# Altium PCB 小键盘 sc_2022-03-27.pcbdoc (part 2 of 2)
Units mil, origin at the board's own origin, x right, y up, seen from the top; angles counter-clockwise.
Board outline 7290 x 4525 mil, 2 copper layers (Top Layer, Bottom Layer); 48 components, 50 nets, 170 pads, 98 vias.
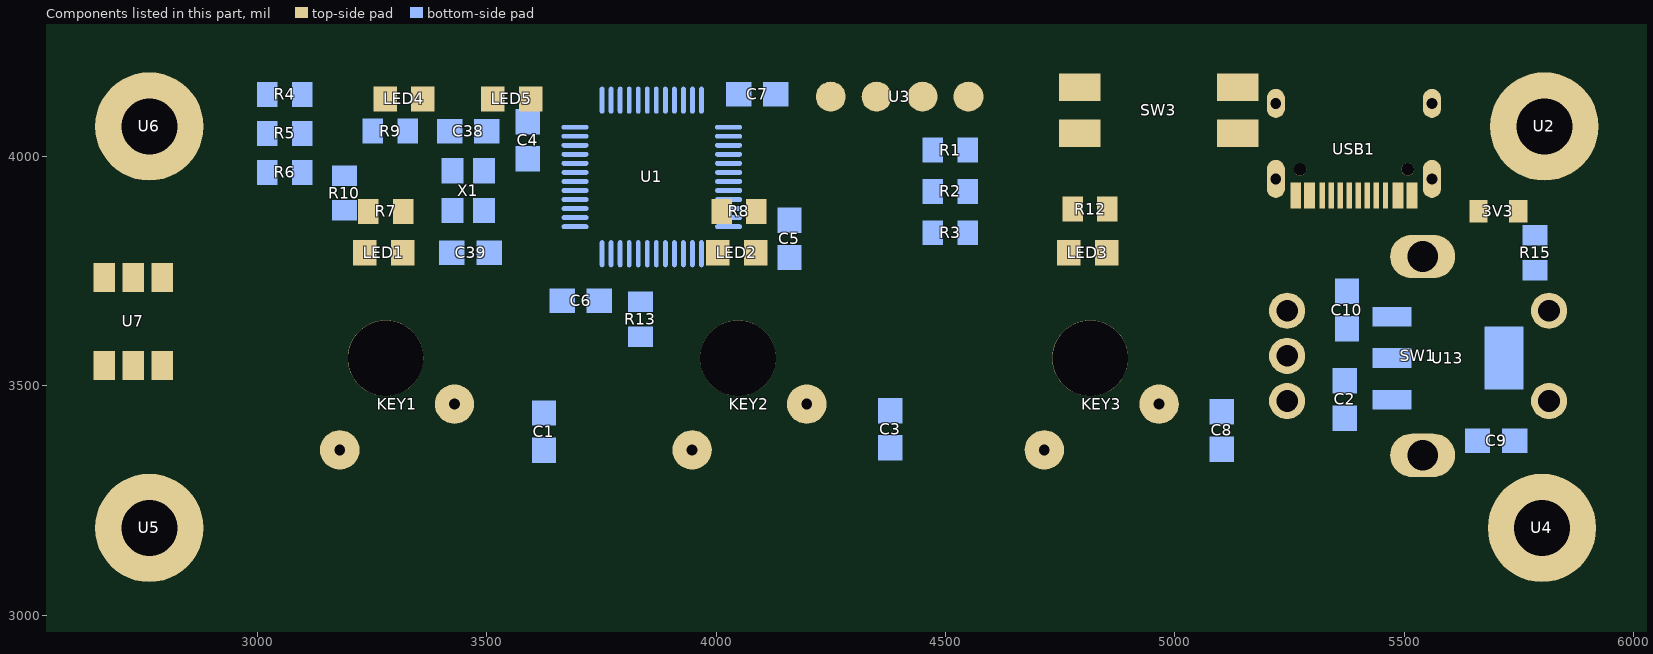
[diagram p2: the components of this part, seen from the top]

## Via types
v1: diameter 24, hole 12, Top Layer to Bottom Layer, tented both sides, 98 vias

## Nets (pads, with @x,y where several pads share a name; then routed paths per layer and width w, separated by ;. In a path a pad name is that pad's centre, name@x,y a point inside that pad or via, vN(x,y) a via of type N, cw(c..) or ccw(c..) an arc to the next point about the centre after c; other vN are vias at no path point) (continued)
copper on no net:
  other v1: 2717.5,3107.73 2812.5,3107.73 5752.5,3107.73 5847.5,3107.73 2670,3190 2860,3190 5705,3190 5895,3190 2717.5,3272.27 2717.5,3272.27 2812.5,3272.27 5752.5,3272.27 5752.5,3272.27 5847.5,3272.27 2717.5,3982.73 2812.5,3982.73 5757.5,3982.73 5852.5,3982.73 2670,4065 2860,4065 5710,4065 5900,4065 2717.5,4147.27 2717.5,4147.27 2812.5,4147.27 5757.5,4147.27 5757.5,4147.27 5852.5,4147.27

## Polygon pours and split planes (outlines as drawn)
GND on Bottom Layer (solid): 1595,5025 7505,5025 7790,4740 7790,1665 7625,1500 2315,1500 1500,2315 1500,2655 1550,2705
GND on Top Layer (solid): 2072.5,4602.5 6887.5,4602.5 6947.5,4662.5 6947.5,2257.5 6667.5,1977.5 2122.5,1977.5 1802.5,2297.5 1802.5,2352.5 2247.5,2797.5

## Keep-outs
Keep-Out Layer:
  lines w10: 2610,3152.01 ccw(c2728.11,3152.01) 2728.11,3033.9 ; 2610,4096.89 cw(c2728.11,4096.89) 2728.11,4215 ; 5838.35,3033.9 ccw(c5838.35,3152.01) 5956.46,3152.01 ; 5838.35,4215 cw(c5838.35,4096.89) 5956.46,4096.89

## Other copper
Top Layer:
  region net D-: 5314,4055 5311.01,4055.08 5308.51,4055.32 5306.4,4055.72 5304.54,4056.25 5302.84,4056.92 5301.17,4057.72 5299.42,4058.64 5297.48,4059.67 5295.23,4060.8 5284,4050 5295.23,4039.2 5297.48,4040.33 5299.42,4041.36 5301.17,4042.28 5302.84,4043.08 5304.54,4043.75 5306.4,4044.28 5308.51,4044.68 5311.01,4044.92 5314,4045
  region net D+: 5314.93,4019.45 5311.84,4020.07 5309.24,4020.63 5307.03,4021.16 5305.08,4021.7 5303.28,4022.28 5301.51,4022.94 5299.66,4023.72 5297.6,4024.66 5295.23,4025.8 5284,4015 5295.23,4004.2 5297.36,4005.33 5299.21,4006.45 5300.89,4007.5 5302.48,4008.44 5304.11,4009.22 5305.87,4009.78 5307.87,4010.07 5310.2,4010.04 5312.98,4009.64
  region net PA5: 3425,3546 3424.32,3534.78 3422.42,3525.8 3419.49,3518.52 3415.73,3512.36 3411.34,3506.76 3406.5,3501.16 3401.42,3495 3396.28,3487.72 3391.3,3478.74 3430,3438.5 3468.7,3478.74 3463.72,3487.72 3458.58,3495 3453.5,3501.16 3448.66,3506.76 3444.27,3512.36 3440.51,3518.52 3437.58,3525.8 3435.68,3534.78 3435,3546
  region net PA5: 3761.57,3919.49 3763.74,3921.55 3765.67,3923.14 3767.45,3924.36 3769.14,3925.3 3770.82,3926.03 3772.56,3926.64 3774.45,3927.23 3776.55,3927.88 3778.94,3928.66 3779.24,3944.24 3763.66,3943.94 3762.88,3941.55 3762.23,3939.45 3761.64,3937.56 3761.03,3935.82 3760.3,3934.14 3759.36,3932.45 3758.14,3930.67 3756.55,3928.74 3754.49,3926.57
  region net PA6: 3959,3850 3956.01,3850.08 3953.51,3850.32 3951.4,3850.72 3949.54,3851.25 3947.84,3851.92 3946.17,3852.72 3944.42,3853.64 3942.48,3854.67 3940.23,3855.8 3929,3845 3940.23,3834.2 3942.48,3835.33 3944.42,3836.36 3946.17,3837.28 3947.84,3838.08 3949.54,3838.75 3951.4,3839.28 3953.51,3839.68 3956.01,3839.92 3959,3840
  region net PA7: 4111.72,3455 4122.94,3454.32 4131.92,3452.42 4139.2,3449.49 4145.36,3445.73 4150.96,3441.34 4156.56,3436.5 4162.72,3431.42 4170,3426.28 4178.98,3421.3 4219.22,3460 4178.98,3498.7 4170,3493.72 4162.72,3488.58 4156.56,3483.5 4150.96,3478.66 4145.36,3474.27 4139.2,3470.51 4131.92,3467.58 4122.94,3465.68 4111.72,3465
  region net PA7: 3909.07,3862.07 3908.32,3865.52 3907.55,3868.37 3906.76,3870.78 3905.95,3872.88 3905.11,3874.83 3904.24,3876.76 3903.32,3878.83 3902.36,3881.17 3901.34,3883.94 3885.76,3884.24 3886.06,3868.66 3888.09,3868.06 3890.03,3867.61 3891.88,3867.21 3893.59,3866.76 3895.15,3866.15 3896.53,3865.29 3897.69,3864.06 3898.61,3862.37 3899.26,3860.12
  region net VCC: 4526.07,4140.01 4528.21,4137.91 4530.18,4136.02 4531.98,4134.32 4533.61,4132.76 4535.04,4131.31 4536.27,4129.95 4537.29,4128.65 4538.09,4127.36 4538.66,4126.06 4554.24,4125.76 4553.94,4141.34 4552.64,4141.91 4551.35,4142.71 4550.05,4143.73 4548.69,4144.96 4547.24,4146.39 4545.68,4148.02 4543.98,4149.82 4542.09,4151.79 4539.99,4153.93
  region net VCC: 5379.84,3486.55 5379.81,3489.55 5379.75,3492.28 5379.69,3494.76 5379.64,3497.01 5379.65,3499.04 5379.74,3500.87 5379.95,3502.52 5380.29,3504 5380.8,3505.32 5370,3516.55 5359.2,3505.32 5359.71,3504 5360.05,3502.52 5360.26,3500.87 5360.35,3499.04 5360.36,3497.01 5360.31,3494.76 5360.25,3492.28 5360.19,3489.55 5360.16,3486.55
  region net VCC: 3210.08,3780.16 3213.07,3780.18 3215.81,3780.25 3218.29,3780.31 3220.54,3780.36 3222.57,3780.35 3224.4,3780.26 3226.05,3780.05 3227.53,3779.71 3228.85,3779.2 3240.08,3790 3228.85,3800.8 3227.53,3800.29 3226.05,3799.95 3224.4,3799.74 3222.57,3799.65 3220.54,3799.64 3218.29,3799.69 3215.81,3799.75 3213.07,3799.82 3210.08,3799.84
  region net VCC: 4146.56,3758.94 4148.74,3761 4150.67,3762.59 4152.45,3763.82 4154.14,3764.75 4155.82,3765.48 4157.56,3766.09 4159.44,3766.68 4161.55,3767.32 4163.94,3768.11 4164.24,3783.69 4148.66,3783.39 4147.88,3781 4147.23,3778.89 4146.64,3777.01 4146.03,3775.27 4145.3,3773.59 4144.36,3771.9 4143.15,3770.12 4141.55,3768.19 4139.49,3766.01
  region net VCC: 4038.62,4156.96 4039.11,4154.34 4039.47,4151.93 4039.72,4149.72 4039.84,4147.71 4039.84,4145.88 4039.72,4144.23 4039.49,4142.74 4039.13,4141.41 4038.65,4140.23 4049.45,4129 4060.25,4140.23 4059.71,4141.69 4059.38,4143.32 4059.21,4145.15 4059.12,4147.17 4059.07,4149.41 4058.98,4151.88 4058.81,4154.59 4058.47,4157.56 4057.93,4160.81
  region net U7_3: 2791.57,3884.49 2793.74,3886.55 2795.67,3888.14 2797.45,3889.36 2799.14,3890.3 2800.82,3891.03 2802.56,3891.64 2804.45,3892.23 2806.55,3892.88 2808.94,3893.66 2809.24,3909.24 2793.66,3908.94 2792.88,3906.55 2792.23,3904.45 2791.64,3902.56 2791.03,3900.82 2790.3,3899.14 2789.36,3897.45 2788.14,3895.67 2786.55,3893.74 2784.49,3891.57
  region net U7_2: 2791.57,3839.49 2793.74,3841.55 2795.67,3843.14 2797.45,3844.36 2799.14,3845.3 2800.82,3846.03 2802.56,3846.64 2804.45,3847.23 2806.55,3847.88 2808.94,3848.66 2809.24,3864.24 2793.66,3863.94 2792.88,3861.55 2792.23,3859.45 2791.64,3857.56 2791.03,3855.82 2790.3,3854.14 2789.36,3852.45 2788.14,3850.67 2786.55,3848.74 2784.49,3846.57
  region net SWCLK: 3965,3904 3964.92,3901.01 3964.68,3898.51 3964.28,3896.4 3963.75,3894.54 3963.08,3892.84 3962.28,3891.17 3961.36,3889.42 3960.33,3887.48 3959.2,3885.23 3970,3874 3980.8,3885.23 3979.67,3887.48 3978.64,3889.42 3977.72,3891.17 3976.92,3892.84 3976.25,3894.54 3975.72,3896.4 3975.32,3898.51 3975.08,3901.01 3975,3904
  region net SWCLK: 4343.19,4106.12 4345.8,4108.66 4348.05,4110.74 4350.01,4112.48 4351.76,4114.02 4353.37,4115.49 4354.91,4117.01 4356.46,4118.71 4358.09,4120.72 4359.86,4123.16 4350.93,4135.93 4338.52,4126.5 4339.03,4124.79 4339.43,4123.21 4339.69,4121.73 4339.77,4120.32 4339.63,4118.95 4339.23,4117.58 4338.54,4116.19 4337.52,4114.73 4336.12,4113.19
  region net SWDIO: 4397.92,3945.96 4395.17,3945.55 4392.85,3945.47 4390.86,3945.69 4389.09,3946.15 4387.46,3946.83 4385.86,3947.68 4384.18,3948.65 4382.34,3949.7 4380.23,3950.8 4369,3940 4380.23,3929.2 4382.61,3930.36 4384.66,3931.36 4386.51,3932.22 4388.25,3932.98 4390.03,3933.66 4391.96,3934.28 4394.17,3934.89 4396.76,3935.51 4399.87,3936.16
  region net SWDIO: 4455,4106 4455.08,4108.99 4455.32,4111.49 4455.72,4113.6 4456.25,4115.46 4456.92,4117.16 4457.72,4118.83 4458.64,4120.58 4459.67,4122.52 4460.8,4124.77 4450,4136 4439.2,4124.77 4440.33,4122.52 4441.36,4120.58 4442.28,4118.83 4443.08,4117.16 4443.75,4115.46 4444.28,4113.6 4444.68,4111.49 4444.92,4108.99 4445,4106
  region net PB15: 4879.43,3455 4890.65,3454.32 4899.63,3452.42 4906.91,3449.49 4913.07,3445.73 4918.67,3441.34 4924.27,3436.5 4930.43,3431.42 4937.71,3426.28 4946.69,3421.3 4986.93,3460 4946.69,3498.7 4937.71,3493.72 4930.43,3488.58 4924.27,3483.5 4918.67,3478.66 4913.07,3474.27 4906.91,3470.51 4899.63,3467.58 4890.65,3465.68 4879.43,3465
  region net PB15: 4115.51,3976.57 4113.45,3978.74 4111.85,3980.67 4110.64,3982.45 4109.7,3984.14 4108.97,3985.82 4108.36,3987.56 4107.77,3989.45 4107.12,3991.55 4106.34,3993.94 4090.76,3994.24 4091.06,3978.66 4093.45,3977.88 4095.55,3977.23 4097.44,3976.64 4099.18,3976.03 4100.86,3975.3 4102.55,3974.36 4104.33,3973.14 4106.26,3971.55 4108.44,3969.49
  region net +5V: 5426,3820.16 5428.99,3820.18 5431.73,3820.25 5434.21,3820.31 5436.46,3820.36 5438.49,3820.35 5440.32,3820.26 5441.97,3820.05 5443.45,3819.71 5444.77,3819.2 5456,3830 5444.77,3840.8 5443.45,3840.29 5441.97,3839.95 5440.32,3839.74 5438.49,3839.65 5436.46,3839.64 5434.21,3839.69 5431.73,3839.75 5428.99,3839.82 5426,3839.84
  region net +5V: 5453.04,3846.96 5452.16,3846.08 5451.31,3845.24 5450.51,3844.44 5449.77,3843.71 5449.11,3843.07 5448.55,3842.54 5448.09,3842.13 5447.77,3841.86 5447.6,3841.76 5445.76,3825.76 5461.76,3827.6 5461.86,3827.77 5462.13,3828.09 5462.54,3828.55 5463.07,3829.11 5463.71,3829.77 5464.44,3830.51 5465.24,3831.31 5466.08,3832.16 5466.96,3833.04
  region net PB14: 4267.63,3999.44 4265.87,4001.34 4264.53,4003.07 4263.56,4004.69 4262.9,4006.26 4262.47,4007.84 4262.23,4009.49 4262.11,4011.27 4262.05,4013.22 4261.99,4015.42 4247.2,4020.3 4242.9,4005.33 4245.17,4003.72 4247.18,4002.42 4249.01,4001.3 4250.72,4000.26 4252.41,3999.19 4254.16,3997.98 4256.05,3996.51 4258.15,3994.68 4260.56,3992.37
  region net U7_1: 2805,3787.09 2805.1,3789.48 2805.39,3791.49 2805.87,3793.19 2806.54,3794.65 2807.4,3795.93 2808.44,3797.11 2809.66,3798.26 2811.06,3799.45 2812.64,3800.74 2807.5,3815.45 2793,3809.74 2793.12,3806.86 2793.34,3804.4 2793.61,3802.21 2793.92,3800.16 2794.23,3798.12 2794.53,3795.93 2794.77,3793.45 2794.94,3790.55 2795,3787.09
  region net 3V3_2: 5764.49,3841.47 5766.55,3839.3 5768.15,3837.37 5769.36,3835.59 5770.3,3833.9 5771.03,3832.22 5771.64,3830.48 5772.23,3828.59 5772.88,3826.49 5773.66,3824.1 5789.24,3823.8 5788.94,3839.38 5786.55,3840.16 5784.44,3840.81 5782.56,3841.4 5780.82,3842.01 5779.14,3842.74 5777.45,3843.68 5775.67,3844.89 5773.74,3846.49 5771.56,3848.55
  region net PA4: 3731,4015 3733.99,4014.92 3736.49,4014.68 3738.6,4014.28 3740.46,4013.75 3742.16,4013.08 3743.83,4012.28 3745.58,4011.36 3747.52,4010.33 3749.77,4009.2 3761,4020 3749.77,4030.8 3747.52,4029.67 3745.58,4028.64 3743.83,4027.72 3742.16,4026.92 3740.46,4026.25 3738.6,4025.72 3736.49,4025.32 3733.99,4025.08 3731,4025
  region net PB10: 3846,4055 3848.99,4054.92 3851.49,4054.68 3853.6,4054.28 3855.46,4053.75 3857.16,4053.08 3858.83,4052.28 3860.58,4051.36 3862.52,4050.33 3864.77,4049.2 3876,4060 3864.77,4070.8 3862.52,4069.67 3860.58,4068.64 3858.83,4067.72 3857.16,4066.92 3855.46,4066.25 3853.6,4065.72 3851.49,4065.32 3848.99,4065.08 3846,4065
  region net PB10: 3350.53,4065 3348.51,4065.16 3346.88,4065.61 3345.57,4066.33 3344.53,4067.28 3343.7,4068.44 3343,4069.77 3342.37,4071.25 3341.77,4072.85 3341.11,4074.53 3325.54,4074.01 3326.66,4058.47 3329.61,4057.62 3332.15,4056.91 3334.43,4056.34 3336.59,4055.88 3338.77,4055.53 3341.11,4055.28 3343.76,4055.12 3346.85,4055.03 3350.53,4055
  region net PB11: 3846,4020 3848.99,4019.92 3851.49,4019.68 3853.6,4019.28 3855.46,4018.75 3857.16,4018.08 3858.83,4017.28 3860.58,4016.36 3862.52,4015.33 3864.77,4014.2 3876,4025 3864.77,4035.8 3862.52,4034.67 3860.58,4033.64 3858.83,4032.72 3857.16,4031.92 3855.46,4031.25 3853.6,4030.72 3851.49,4030.32 3848.99,4030.08 3846,4030
  region net PB11: 3218.43,3980.51 3216.26,3978.45 3214.33,3976.86 3212.55,3975.64 3210.86,3974.7 3209.18,3973.97 3207.44,3973.36 3205.55,3972.77 3203.45,3972.12 3201.06,3971.34 3200.76,3955.76 3216.34,3956.06 3217.12,3958.45 3217.77,3960.55 3218.36,3962.44 3218.97,3964.18 3219.7,3965.86 3220.64,3967.55 3221.86,3969.33 3223.45,3971.26 3225.51,3973.43
  region net LED4_2: 3264.68,4074.83 3262.98,4072.57 3261.32,4070.91 3259.68,4069.74 3258,4068.93 3256.27,4068.36 3254.44,4067.94 3252.48,4067.54 3250.35,4067.04 3248.02,4066.34 3247.72,4050.76 3263.3,4051.06 3264.18,4053.53 3264.99,4055.63 3265.78,4057.47 3266.61,4059.16 3267.51,4060.81 3268.55,4062.53 3269.78,4064.45 3271.24,4066.66 3272.99,4069.27
  region net LED5_2: 3169.51,3895.41 3171.57,3893.24 3173.16,3891.31 3174.38,3889.54 3175.31,3887.85 3176.04,3886.17 3176.65,3884.43 3177.23,3882.54 3177.87,3880.44 3178.66,3878.05 3194.23,3877.71 3193.97,3893.29 3191.57,3894.08 3189.47,3894.73 3187.59,3895.32 3185.84,3895.94 3184.16,3896.68 3182.47,3897.61 3180.7,3898.83 3178.76,3900.43 3176.59,3902.49
Bottom Layer:
  region net VCC: 5380.22,3534.58 5377.18,3532.47 5374.5,3530.47 5372.13,3528.59 5370.04,3526.81 5368.18,3525.16 5366.51,3523.61 5365,3522.19 5363.59,3520.89 5362.25,3519.71 5367.56,3505.07 5381.99,3510.95 5382.12,3511.77 5382.56,3512.54 5383.25,3513.26 5384.18,3513.97 5385.31,3514.7 5386.6,3515.46 5388.03,3516.28 5389.56,3517.19 5391.16,3518.21
  region net VCC: 5348.84,3518.21 5350.44,3517.19 5351.97,3516.28 5353.4,3515.46 5354.69,3514.7 5355.82,3513.97 5356.75,3513.26 5357.44,3512.54 5357.88,3511.77 5358.01,3510.95 5372.44,3505.07 5377.75,3519.71 5376.41,3520.89 5375,3522.19 5373.49,3523.61 5371.82,3525.16 5369.96,3526.81 5367.87,3528.59 5365.5,3530.47 5362.82,3532.47 5359.78,3534.58
  region net VCC: 3258.01,3779.99 3255.87,3782.09 3253.9,3783.97 3252.1,3785.68 3250.47,3787.24 3249.04,3788.69 3247.81,3790.05 3246.79,3791.36 3245.99,3792.64 3245.41,3793.94 3229.84,3794.24 3230.14,3778.66 3231.44,3778.09 3232.72,3777.29 3234.03,3776.27 3235.39,3775.04 3236.84,3773.61 3238.4,3771.98 3240.11,3770.18 3241.99,3768.21 3244.09,3766.07
  region net VCC: 4796.12,3799.84 4793.12,3799.82 4790.39,3799.75 4787.91,3799.69 4785.66,3799.64 4783.63,3799.65 4781.8,3799.74 4780.15,3799.95 4778.67,3800.29 4777.35,3800.8 4766.12,3790 4777.35,3779.2 4778.67,3779.71 4780.15,3780.05 4781.8,3780.26 4783.63,3780.35 4785.66,3780.36 4787.91,3780.31 4790.39,3780.25 4793.12,3780.18 4796.12,3780.16
  region net VCC: 4751.79,3769.61 4755.51,3769.87 4758.78,3770.59 4761.66,3771.64 4764.21,3772.9 4766.49,3774.25 4768.54,3775.57 4770.43,3776.74 4772.22,3777.64 4773.96,3778.14 4777.05,3793.41 4761.67,3795.91 4761.19,3795.07 4760.59,3794.14 4759.86,3793.17 4758.98,3792.2 4757.93,3791.29 4756.71,3790.5 4755.29,3789.86 4753.65,3789.44 4751.79,3789.29
  region net VCC: 4139.49,3792.89 4141.55,3790.71 4143.15,3788.78 4144.36,3787 4145.3,3785.31 4146.03,3783.63 4146.64,3781.89 4147.23,3780.01 4147.88,3777.9 4148.66,3775.51 4164.24,3775.21 4163.94,3790.78 4161.55,3791.57 4159.44,3792.22 4157.56,3792.81 4155.82,3793.42 4154.14,3794.15 4152.45,3795.09 4150.67,3796.3 4148.74,3797.9 4146.56,3799.96
  region net VCC: 4184,3789.29 4181.01,3789.26 4178.27,3789.2 4175.79,3789.14 4173.54,3789.09 4171.51,3789.1 4169.68,3789.19 4168.03,3789.4 4166.55,3789.74 4165.23,3790.25 4154,3779.45 4165.23,3768.65 4166.55,3769.16 4168.03,3769.5 4169.68,3769.71 4171.51,3769.8 4173.54,3769.81 4175.79,3769.76 4178.27,3769.7 4181.01,3769.64 4184,3769.61
  region net VCC: 4025.45,4130 4028.44,4129.92 4030.94,4129.68 4033.05,4129.28 4034.91,4128.75 4036.61,4128.08 4038.28,4127.28 4040.03,4126.36 4041.97,4125.33 4044.22,4124.2 4055.45,4135 4044.22,4145.8 4041.97,4144.67 4040.03,4143.64 4038.28,4142.72 4036.61,4141.92 4034.91,4141.25 4033.05,4140.72 4030.94,4140.32 4028.44,4140.08 4025.45,4140
  region net SWDIO: 4351,3935 4353.99,3934.92 4356.49,3934.68 4358.6,3934.28 4360.46,3933.75 4362.16,3933.08 4363.83,3932.28 4365.58,3931.36 4367.52,3930.33 4369.77,3929.2 4381,3940 4369.77,3950.8 4367.52,3949.67 4365.58,3948.64 4363.83,3947.72 4362.16,3946.92 4360.46,3946.25 4358.6,3945.72 4356.49,3945.32 4353.99,3945.08 4351,3945
  region net SWCLK: 3975,3856 3975.08,3858.99 3975.32,3861.49 3975.72,3863.6 3976.25,3865.46 3976.92,3867.16 3977.72,3868.83 3978.64,3870.58 3979.67,3872.52 3980.8,3874.77 3970,3886 3959.2,3874.77 3960.33,3872.52 3961.36,3870.58 3962.28,3868.83 3963.08,3867.16 3963.75,3865.46 3964.28,3863.6 3964.68,3861.49 3964.92,3858.99 3965,3856
  region net D+: 5266,4010 5268.99,4009.92 5271.49,4009.68 5273.6,4009.28 5275.46,4008.75 5277.16,4008.08 5278.83,4007.28 5280.58,4006.36 5282.52,4005.33 5284.77,4004.2 5296,4015 5284.77,4025.8 5282.52,4024.67 5280.58,4023.64 5278.83,4022.72 5277.16,4021.92 5275.46,4021.25 5273.6,4020.72 5271.49,4020.32 5268.99,4020.08 5266,4020
  region net D-: 5266,4045 5268.99,4044.92 5271.49,4044.68 5273.6,4044.28 5275.46,4043.75 5277.16,4043.08 5278.83,4042.28 5280.58,4041.36 5282.52,4040.33 5284.77,4039.2 5296,4050 5284.77,4060.8 5282.52,4059.67 5280.58,4058.64 5278.83,4057.72 5277.16,4056.92 5275.46,4056.25 5273.6,4055.72 5271.49,4055.32 5268.99,4055.08 5266,4055
  region net EC11_B: 5185.37,3518.73 5192.19,3511.06 5196.79,3504.05 5199.65,3497.47 5201.26,3491.08 5202.09,3484.64 5202.63,3477.93 5203.37,3470.68 5204.78,3462.68 5207.36,3453.69 5258.47,3452.64 5257.52,3503.75 5248.52,3506.34 5240.52,3507.77 5233.28,3508.52 5226.56,3509.07 5220.12,3509.91 5213.73,3511.52 5207.14,3514.38 5200.13,3518.98 5192.44,3525.81
  region net KEY3: 5775.94,3398.87 5784.43,3406.51 5792.14,3411.95 5799.27,3415.75 5806.03,3418.52 5812.64,3420.82 5819.28,3423.24 5826.17,3426.37 5833.51,3430.78 5841.5,3437.07 5823.02,3484.73 5776.12,3464.4 5776.94,3456.22 5778.18,3448.92 5779.51,3442.3 5780.55,3436.16 5780.94,3430.32 5780.33,3424.57 5778.35,3418.72 5774.65,3412.57 5768.87,3405.94
  region net PA4: 3765.18,4040.46 3764.07,4038.18 3762.86,4036.44 3761.55,4035.15 3760.14,4034.21 3758.6,4033.53 3756.93,4032.99 3755.13,4032.51 3753.17,4031.99 3751.06,4031.34 3750.76,4015.76 3766.34,4016.06 3767.26,4018.71 3768.08,4020.97 3768.83,4022.97 3769.55,4024.84 3770.3,4026.7 3771.11,4028.68 3772.04,4030.92 3773.13,4033.52 3774.42,4036.63
  region net PA5: 3511.35,3445.55 3502.1,3446.22 3494.8,3448.13 3489.03,3451.17 3484.4,3455.22 3480.51,3460.13 3476.95,3465.8 3473.32,3472.09 3469.21,3478.87 3464.22,3486.04 3410.82,3469.72 3429.21,3417.01 3440.47,3417.46 3449.78,3419.07 3457.74,3421.51 3464.97,3424.46 3472.06,3427.59 3479.64,3430.59 3488.31,3433.13 3498.67,3434.89 3511.35,3435.55
  region net PA5: 3785.07,3960.53 3783.96,3958.25 3782.77,3956.51 3781.47,3955.21 3780.07,3954.26 3778.55,3953.56 3776.9,3953.01 3775.11,3952.52 3773.16,3952 3771.06,3951.34 3770.76,3935.76 3786.34,3936.06 3787.26,3938.71 3788.07,3940.98 3788.8,3942.99 3789.51,3944.87 3790.23,3946.74 3791.03,3948.73 3791.94,3950.97 3793.02,3953.59 3794.31,3956.7
  region net PA6: 3911,3840 3913.99,3839.92 3916.49,3839.68 3918.6,3839.28 3920.46,3838.75 3922.16,3838.08 3923.83,3837.28 3925.58,3836.36 3927.52,3835.33 3929.77,3834.2 3941,3845 3929.77,3855.8 3927.52,3854.67 3925.58,3853.64 3923.83,3852.72 3922.16,3851.92 3920.46,3851.25 3918.6,3850.72 3916.49,3850.32 3913.99,3850.08 3911,3850
  region net PA7: 4281.22,3450.55 4271.39,3451.22 4263.6,3453.14 4257.41,3456.18 4252.36,3460.19 4247.99,3465.05 4243.87,3470.61 4239.52,3476.73 4234.51,3483.29 4228.38,3490.15 4177.47,3467.22 4202.37,3417.25 4213.27,3419.09 4222.2,3421.78 4229.78,3425.04 4236.63,3428.59 4243.35,3432.13 4250.56,3435.39 4258.86,3438.06 4268.88,3439.88 4281.22,3440.55
  region net PA7: 3869.49,3893.43 3871.55,3891.26 3873.14,3889.33 3874.36,3887.55 3875.3,3885.86 3876.03,3884.18 3876.64,3882.44 3877.23,3880.55 3877.88,3878.45 3878.66,3876.06 3894.24,3875.76 3893.94,3891.34 3891.55,3892.12 3889.45,3892.77 3887.56,3893.36 3885.82,3893.97 3884.14,3894.7 3882.45,3895.64 3880.67,3896.86 3878.74,3898.45 3876.57,3900.51
  region net EC11_A: 5181.17,3700 5189.17,3699.07 5194.83,3696.45 5198.6,3692.37 5200.94,3687.07 5202.31,3680.79 5203.18,3673.75 5204.01,3666.2 5205.25,3658.38 5207.37,3650.51 5258.47,3649.5 5257.49,3700.61 5247.67,3703.87 5239.32,3706.3 5231.96,3708.01 5225.09,3709.13 5218.23,3709.76 5210.9,3710.05 5202.6,3710.1 5192.85,3710.05 5181.17,3710
  region net PB15: 5047.95,3448.05 5038.4,3448.72 5030.85,3450.64 5024.86,3453.68 5020.02,3457.71 5015.89,3462.6 5012.04,3468.23 5008.05,3474.45 5003.48,3481.14 4997.91,3488.18 4945.67,3468.47 4967.4,3417.05 4978.5,3418.21 4987.64,3420.38 4995.42,3423.24 5002.46,3426.5 5009.37,3429.85 5016.76,3432.98 5025.25,3435.59 5035.44,3437.39 5047.95,3438.05
  region net PB15: 4074.14,3999.39 4076.38,3998.32 4078.14,3997.18 4079.48,3995.97 4080.49,3994.65 4081.27,3993.23 4081.89,3991.67 4082.44,3989.97 4083,3988.1 4083.66,3986.06 4099.24,3985.76 4098.94,4001.34 4096.27,4002.24 4093.97,4002.98 4091.92,4003.62 4089.99,4004.22 4088.07,4004.83 4086.03,4005.52 4083.75,4006.34 4081.1,4007.36 4077.96,4008.63
  region net PB14: 4228.62,4018.9 4230.81,4018.74 4232.59,4018.29 4234.02,4017.57 4235.18,4016.62 4236.15,4015.45 4236.98,4014.11 4237.77,4012.61 4238.57,4010.99 4239.46,4009.27 4254.88,4011.51 4252.04,4026.83 4249.09,4027.33 4246.57,4027.75 4244.31,4028.1 4242.19,4028.37 4240.06,4028.58 4237.78,4028.73 4235.21,4028.83 4232.21,4028.88 4228.62,4028.9
  region net +5V: 5459.84,3806 5459.81,3808.99 5459.75,3811.73 5459.69,3814.21 5459.64,3816.46 5459.65,3818.49 5459.74,3820.32 5459.95,3821.97 5460.29,3823.45 5460.8,3824.77 5450,3836 5439.2,3824.77 5439.71,3823.45 5440.05,3821.97 5440.26,3820.32 5440.35,3818.49 5440.36,3816.46 5440.31,3814.21 5440.25,3811.73 5440.19,3808.99 5440.16,3806
  region net U7_1: 2815.56,3832.63 2813.15,3830.32 2811.05,3828.49 2809.16,3827.02 2807.41,3825.81 2805.72,3824.74 2804.01,3823.7 2802.18,3822.58 2800.17,3821.28 2797.9,3819.67 2802.2,3804.7 2816.99,3809.58 2817.05,3811.78 2817.11,3813.73 2817.23,3815.51 2817.47,3817.16 2817.89,3818.74 2818.56,3820.31 2819.53,3821.93 2820.87,3823.66 2822.63,3825.56
  region net U7_3: 2818.43,3925.51 2816.26,3923.45 2814.33,3921.86 2812.55,3920.64 2810.86,3919.7 2809.18,3918.97 2807.44,3918.36 2805.55,3917.77 2803.45,3917.12 2801.06,3916.34 2800.76,3900.76 2816.34,3901.06 2817.12,3903.45 2817.77,3905.55 2818.36,3907.44 2818.97,3909.18 2819.7,3910.86 2820.64,3912.55 2821.86,3914.33 2823.45,3916.26 2825.51,3918.43
  region net U7_2: 2818.43,3880.51 2816.26,3878.45 2814.33,3876.86 2812.55,3875.64 2810.86,3874.7 2809.18,3873.97 2807.44,3873.36 2805.55,3872.77 2803.45,3872.12 2801.06,3871.34 2800.76,3855.76 2816.34,3856.06 2817.12,3858.45 2817.77,3860.55 2818.36,3862.44 2818.97,3864.18 2819.7,3865.86 2820.64,3867.55 2821.86,3869.33 2823.45,3871.26 2825.51,3873.43
  region net PB12: 4771,4145 4773.99,4144.92 4776.49,4144.68 4778.6,4144.28 4780.46,4143.75 4782.16,4143.08 4783.83,4142.28 4785.58,4141.36 4787.52,4140.33 4789.77,4139.2 4801,4150 4789.77,4160.8 4787.52,4159.67 4785.58,4158.64 4783.83,4157.72 4782.16,4156.92 4780.46,4156.25 4778.6,4155.72 4776.49,4155.32 4773.99,4155.08 4771,4155
  region net PB13: 4774.47,4055 4776.49,4054.84 4778.12,4054.39 4779.43,4053.67 4780.47,4052.72 4781.31,4051.56 4782,4050.23 4782.63,4048.75 4783.23,4047.15 4783.89,4045.47 4799.46,4045.99 4798.34,4061.53 4795.39,4062.38 4792.85,4063.09 4790.57,4063.66 4788.41,4064.12 4786.23,4064.47 4783.89,4064.72 4781.24,4064.88 4778.15,4064.97 4774.47,4065
  region net PB10: 3891.76,4066.24 3889.32,4065.43 3887.22,4065.13 3885.38,4065.27 3883.72,4065.77 3882.15,4066.54 3880.6,4067.51 3878.98,4068.6 3877.22,4069.72 3875.23,4070.8 3864,4060 3875.23,4049.2 3877.74,4050.37 3879.92,4051.29 3881.88,4052.04 3883.75,4052.7 3885.63,4053.32 3887.64,4054 3889.9,4054.78 3892.51,4055.76 3895.59,4057
  region net PB11: 3892.92,4030.96 3890.17,4030.55 3887.85,4030.47 3885.86,4030.69 3884.09,4031.15 3882.46,4031.83 3880.86,4032.68 3879.18,4033.65 3877.34,4034.7 3875.23,4035.8 3864,4025 3875.23,4014.2 3877.61,4015.36 3879.66,4016.36 3881.51,4017.22 3883.25,4017.98 3885.03,4018.66 3886.96,4019.28 3889.17,4019.89 3891.76,4020.51 3894.87,4021.16
  region net PB11: 3190,3953.04 3191.02,3953.02 3191.98,3952.96 3192.87,3952.86 3193.69,3952.74 3194.41,3952.59 3195.03,3952.43 3195.53,3952.26 3195.9,3952.09 3196.13,3951.91 3210.92,3960.98 3194,3964.8 3193.88,3964.62 3193.67,3964.4 3193.36,3964.15 3192.97,3963.88 3192.5,3963.63 3191.97,3963.4 3191.36,3963.21 3190.71,3963.09 3190,3963.04

## Silkscreen, mask and mechanical layers (free items; w line width, h text height)
Top Overlay:
  text "GND CLK DIO 3V3" at 4200,4045 h43.31
  text "JLCJLCJLCJLC" at 4615,3645.32 h39.37
  text "By: / Ptisak" at 2650,3430 h59.05

## Text inside footprints (layer, text, board x,y; h text height)
SW3: Top Overlay "ON" at 4886.26,4029.88 h30; Top Overlay "ON" at 4886.26,4132.24 h30